# Altium PCB MCU_FOR_DOWNLOAD_V6_8_ROW_PCS.PcbDoc (part 4 of 4)
Units mil, origin at the board's own origin, x right, y up, seen from the top; angles counter-clockwise.
Board outline 2364.06 x 7042.09 mil, 4 copper layers (Top, GND1, GND2, Bottom), stack 35.4 mil thick; 280 components, 38 nets, 1144 pads, 944 vias.
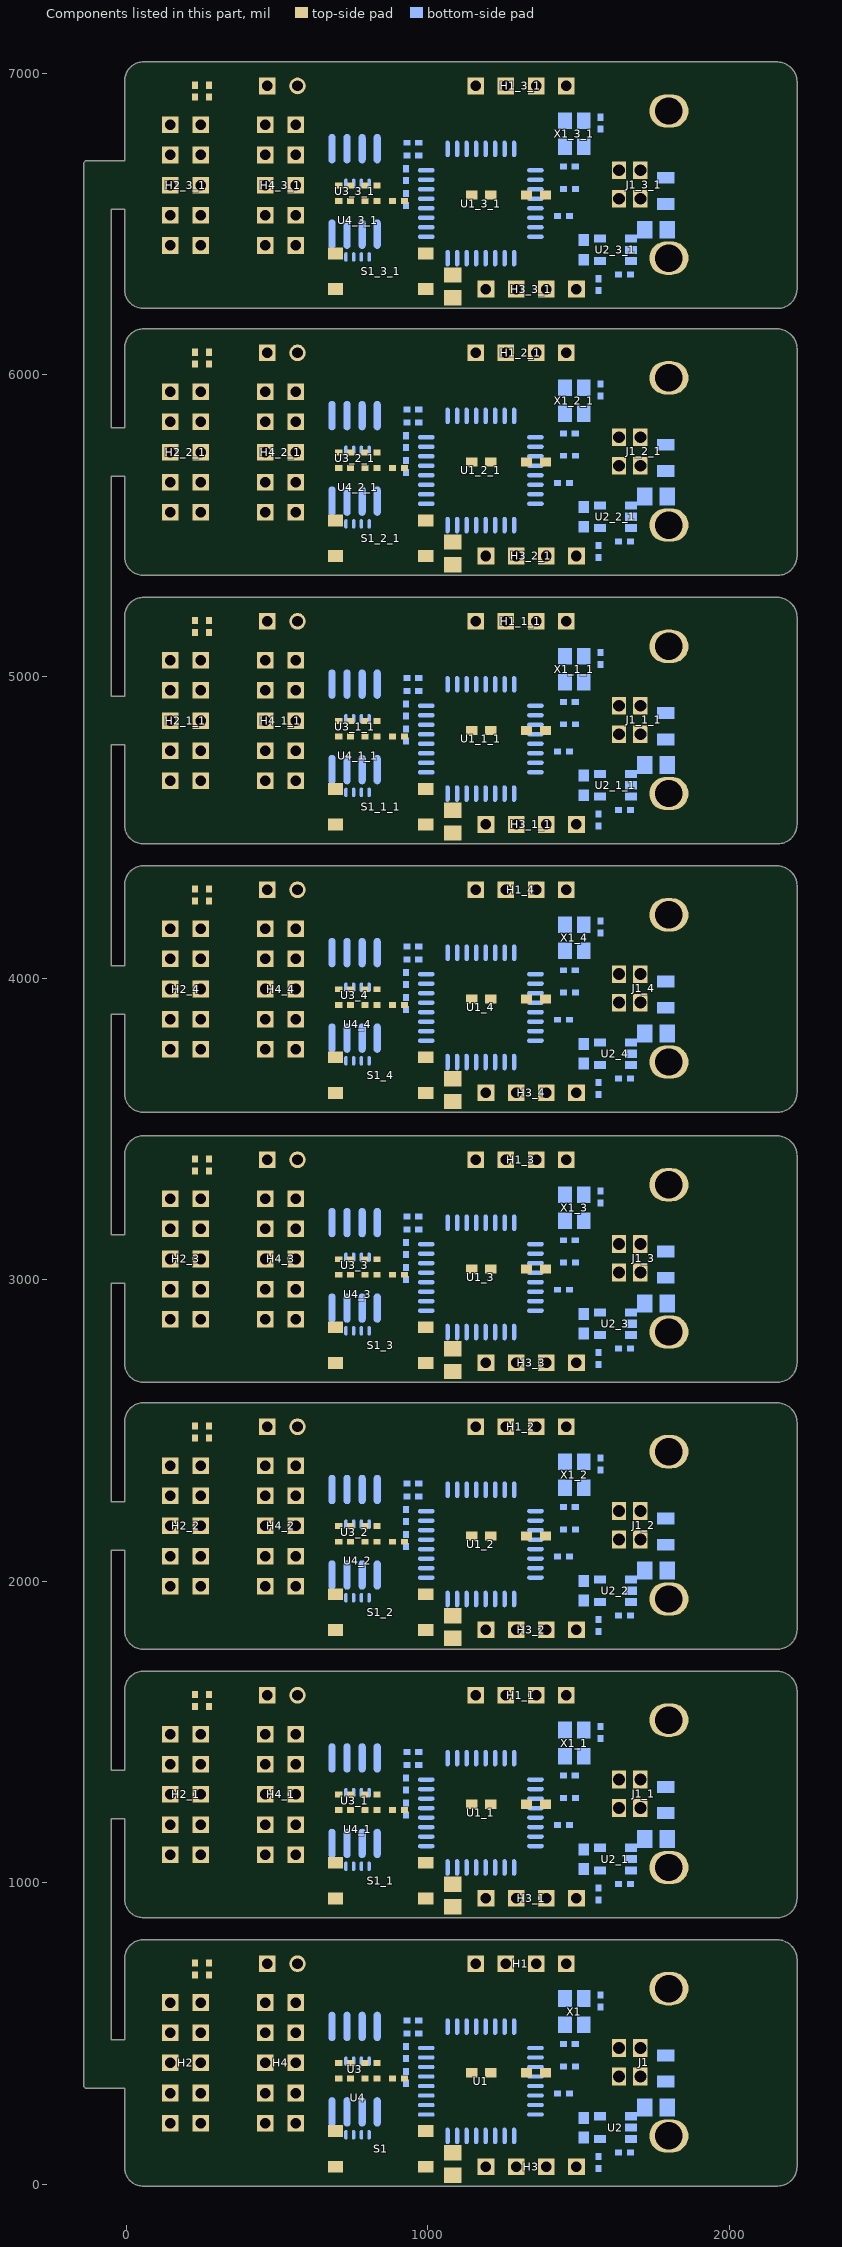
[diagram p4: the components of this part, seen from the top]

## Via types
v1: diameter 16/16/16/16 (per signal layer), hole 8, Top to Bottom, 936 vias
v2: diameter 55/55/55/55 (per signal layer), hole 37, Top to Bottom, 8 vias

## Nets (pads, with @x,y where several pads share a name; then routed paths per layer and width w, separated by ;. In a path a pad name is that pad's centre, name@x,y a point inside that pad or via, vN(x,y) a via of type N, cw(c..) or ccw(c..) an arc to the next point about the centre after c; other vN are vias at no path point) (continued)
copper on no net: (continued)
  other v1: 1723.62,917.17 1066.93,927.4 633.86,933.31 87.4,936.85 293.7,940 222.83,940.79 830.71,941.18 512.2,943.15 891.73,943.15 338.19,945.12 440.16,944.72 605.51,946.3 387.8,947.09 1934.25,949.45 61.81,958.11 772.83,957.72 1718.5,958.11 1917.32,1063.23 1896.46,1112.83 1261.81,1143.94 31.5,1189.21 403.54,1202.99 1909.45,1210.87 1120.08,1226.61 651.97,1235.28 118.11,1242.36 366.54,1249.84 297.24,1285.67 608.27,1291.18 1070.87,1307.32 1141.73,1309.29 1196.85,1327.01 685.04,1332.91 1913.39,1348.66 616.14,1380.16 25.2,1399.45 354.33,1403.78 1009.84,1407.72 1840.55,1415.59 1336.61,1417.56 1393.31,1419.53 1584.65,1425.43 1907.48,1441.18 1631.89,1458.9 1738.19,1464.8 1244.09,1478.58 874.02,1480.55 307.09,1482.52 1362.2,1492.36 1307.09,1496.3 1047.24,1510.08 991.34,1541.18 192.91,1541.57 1661.42,1553.39 572.83,1559.29 490.16,1561.26 1539.37,1578.98 419.29,1586.46 27.56,1587.64 371.26,1591.97 145.67,1611.65 337.4,1615.59 1098.82,1620.31 649.61,1623.07 921.26,1625.04 1635.83,1626.22 1742.13,1626.22 1909.45,1626.22 1828.74,1628.19 527.56,1668.35 761.81,1673.46 982.28,1673.86 1383.86,1673.46 1771.65,1673.46 1236.22,1677.4 1723.62,1807.17 1066.93,1817.4 633.86,1823.31 87.4,1826.85 293.7,1830 222.83,1830.79 830.71,1831.18 512.2,1833.15 891.73,1833.15 338.19,1835.12 440.16,1834.72 605.51,1836.3 387.8,1837.09 1934.25,1839.45 61.81,1848.11 772.83,1847.72 1718.5,1848.11 1917.32,1953.23 1896.46,2002.83 1261.81,2033.94 31.5,2079.21 403.54,2092.99 1909.45,2100.87 1120.08,2116.61 651.97,2125.28 118.11,2132.36 366.54,2139.84 297.24,2175.67 608.27,2181.18 1070.87,2197.32 1141.73,2199.29 1196.85,2217.01 685.04,2222.91 1913.39,2238.66 616.14,2270.16 25.2,2289.45 354.33,2293.78 1009.84,2297.72 1840.55,2305.59 1336.61,2307.56 1393.31,2309.53 1584.65,2315.43 1907.48,2331.18 1631.89,2348.9 1738.19,2354.8 1244.09,2368.58 874.02,2370.55 307.09,2372.52 1362.2,2382.36 1307.09,2386.3 1047.24,2400.08 991.34,2431.18 192.91,2431.57 1661.42,2443.39 572.83,2449.29 490.16,2451.26 1539.37,2468.98 419.29,2476.46 27.56,2477.64 371.26,2481.97 145.67,2501.65 337.4,2505.59 1098.82,2510.31 649.61,2513.07 921.26,2515.04 1635.83,2516.22 1742.13,2516.22 1909.45,2516.22 1828.74,2518.19 527.56,2558.35 761.81,2563.46 982.28,2563.86 1383.86,2563.46 1771.65,2563.46 1236.22,2567.4 1723.62,2692.17 1066.93,2702.4 633.86,2708.31 87.4,2711.85 293.7,2715 222.83,2715.79 830.71,2716.18 512.2,2718.15 891.73,2718.15 338.19,2720.12 440.16,2719.72 605.51,2721.3 387.8,2722.09 1934.25,2724.45 61.81,2733.11 772.83,2732.72 1718.5,2733.11 1917.32,2838.23 1896.46,2887.83 1261.81,2918.94 31.5,2964.21 403.54,2977.99 1909.45,2985.87 1120.08,3001.61 651.97,3010.28 118.11,3017.36 366.54,3024.84 297.24,3060.67 608.27,3066.18 1070.87,3082.32 1141.73,3084.29 1196.85,3102.01 685.04,3107.91 1913.39,3123.66 616.14,3155.16 25.2,3174.45 354.33,3178.78 1009.84,3182.72 1840.55,3190.59 1336.61,3192.56 1393.31,3194.53 1584.65,3200.43 1907.48,3216.18 1631.89,3233.9 1738.19,3239.8 1244.09,3253.58 874.02,3255.55 307.09,3257.52 1362.2,3267.36 1307.09,3271.3 1047.24,3285.08 991.34,3316.18 192.91,3316.57 1661.42,3328.39 572.83,3334.29 490.16,3336.26 1539.37,3353.98 419.29,3361.46 27.56,3362.64 371.26,3366.97 145.67,3386.65 337.4,3390.59 1098.82,3395.31 649.61,3398.07 921.26,3400.04 1635.83,3401.22 1742.13,3401.22 1909.45,3401.22 1828.74,3403.19 527.56,3443.35 761.81,3448.46 982.28,3448.86 1383.86,3448.46 1771.65,3448.46 1236.22,3452.4 1723.62,3587.17 1066.93,3597.4 633.86,3603.31 87.4,3606.85 293.7,3610 222.83,3610.79 830.71,3611.18 512.2,3613.15 891.73,3613.15 338.19,3615.12 440.16,3614.72 605.51,3616.3 387.8,3617.09 1934.25,3619.45 61.81,3628.11 772.83,3627.72 1718.5,3628.11 1917.32,3733.23 1896.46,3782.83 1261.81,3813.94 31.5,3859.21 403.54,3872.99 1909.45,3880.87 1120.08,3896.61 651.97,3905.28 118.11,3912.36 366.54,3919.84 297.24,3955.67 608.27,3961.18 1070.87,3977.32 1141.73,3979.29 1196.85,3997.01 685.04,4002.91 1913.39,4018.66 616.14,4050.16 25.2,4069.45 354.33,4073.78 1009.84,4077.72 1840.55,4085.59 1336.61,4087.56 1393.31,4089.53 1584.65,4095.43 1907.48,4111.18 1631.89,4128.9 1738.19,4134.8 1244.09,4148.58 874.02,4150.55 307.09,4152.52 1362.2,4162.36 1307.09,4166.3 1047.24,4180.08 991.34,4211.18 192.91,4211.57 1661.42,4223.39 572.83,4229.29 490.16,4231.26 1539.37,4248.98 419.29,4256.46 27.56,4257.64 371.26,4261.97 145.67,4281.65 337.4,4285.59 1098.82,4290.31 649.61,4293.07 921.26,4295.04 1635.83,4296.22 1742.13,4296.22 1909.45,4296.22 1828.74,4298.19 527.56,4338.35 761.81,4343.46 982.28,4343.86 1383.86,4343.46 1771.65,4343.46 1236.22,4347.4 1723.62,4477.17 1066.93,4487.4 633.86,4493.31 87.4,4496.85 293.7,4500 222.83,4500.79 830.71,4501.18 512.2,4503.15 891.73,4503.15 338.19,4505.12 440.16,4504.72 605.51,4506.3 387.8,4507.09 1934.25,4509.45 61.81,4518.11 772.83,4517.72 1718.5,4518.11 1917.32,4623.23 1896.46,4672.83 1261.81,4703.94 31.5,4749.21 403.54,4762.99 1909.45,4770.87 1120.08,4786.61 651.97,4795.28 118.11,4802.36 366.54,4809.84 297.24,4845.67 608.27,4851.18 1070.87,4867.32 1141.73,4869.29 1196.85,4887.01 685.04,4892.91 1913.39,4908.66 616.14,4940.16 25.2,4959.45 354.33,4963.78 1009.84,4967.72 1840.55,4975.59 1336.61,4977.56 1393.31,4979.53 1584.65,4985.43 1907.48,5001.18 1631.89,5018.9 1738.19,5024.8 1244.09,5038.58 874.02,5040.55 307.09,5042.52 1362.2,5052.36 1307.09,5056.3 1047.24,5070.08 991.34,5101.18 192.91,5101.57 1661.42,5113.39 572.83,5119.29 490.16,5121.26 1539.37,5138.98 419.29,5146.46 27.56,5147.64 371.26,5151.97 145.67,5171.65 337.4,5175.59 1098.82,5180.31 649.61,5183.07 921.26,5185.04 1635.83,5186.22 1742.13,5186.22 1909.45,5186.22 1828.74,5188.19 527.56,5228.35 761.81,5233.46 982.28,5233.86 1383.86,5233.46 1771.65,5233.46 1236.22,5237.4 1723.62,5367.17 1066.93,5377.4 633.86,5383.31 87.4,5386.85 293.7,5390 222.83,5390.79 830.71,5391.18 512.2,5393.15 891.73,5393.15 338.19,5395.12 440.16,5394.72 605.51,5396.3 387.8,5397.09 1934.25,5399.45 61.81,5408.11 772.83,5407.72 1718.5,5408.11 1917.32,5513.23 1896.46,5562.83 1261.81,5593.94 31.5,5639.21 403.54,5652.99 1909.45,5660.87 1120.08,5676.61 651.97,5685.28 118.11,5692.36 366.54,5699.84 297.24,5735.67 608.27,5741.18 1070.87,5757.32 1141.73,5759.29 1196.85,5777.01 685.04,5782.91 1913.39,5798.66 616.14,5830.16 25.2,5849.45 354.33,5853.78 1009.84,5857.72 1840.55,5865.59 1336.61,5867.56 1393.31,5869.53 1584.65,5875.43 1907.48,5891.18 1631.89,5908.9 1738.19,5914.8 1244.09,5928.58 874.02,5930.55 307.09,5932.52 1362.2,5942.36 1307.09,5946.3 1047.24,5960.08 991.34,5991.18 192.91,5991.57 1661.42,6003.39 572.83,6009.29 490.16,6011.26 1539.37,6028.98 419.29,6036.46 27.56,6037.64 371.26,6041.97 145.67,6061.65 337.4,6065.59 1098.82,6070.31 649.61,6073.07 921.26,6075.04 1635.83,6076.22 1742.13,6076.22 1909.45,6076.22 1828.74,6078.19 527.56,6118.35 761.81,6123.46 982.28,6123.86 1383.86,6123.46 1771.65,6123.46 1236.22,6127.4 1723.62,6252.17 1066.93,6262.4 633.86,6268.31 87.4,6271.85 293.7,6275 222.83,6275.79 830.71,6276.18 512.2,6278.15 891.73,6278.15 338.19,6280.12 440.16,6279.72 605.51,6281.3 387.8,6282.09 1934.25,6284.45 61.81,6293.11 772.83,6292.72 1718.5,6293.11 1917.32,6398.23 1896.46,6447.83 1261.81,6478.94 31.5,6524.21 403.54,6537.99 1909.45,6545.87 1120.08,6561.61 651.97,6570.28 118.11,6577.36 366.54,6584.84 297.24,6620.67 608.27,6626.18 1070.87,6642.32 1141.73,6644.29 1196.85,6662.01 685.04,6667.91 1913.39,6683.66 616.14,6715.16 25.2,6734.45 354.33,6738.78 1009.84,6742.72 1840.55,6750.59 1336.61,6752.56 1393.31,6754.53 1584.65,6760.43 1907.48,6776.18 1631.89,6793.9 1738.19,6799.8 1244.09,6813.58 874.02,6815.55 307.09,6817.52 1362.2,6827.36 1307.09,6831.3 1047.24,6845.08 991.34,6876.18 192.91,6876.57 1661.42,6888.39 572.83,6894.29 490.16,6896.26 1539.37,6913.98 419.29,6921.46 27.56,6922.64 371.26,6926.97 145.67,6946.65 337.4,6950.59 1098.82,6955.31 649.61,6958.07 921.26,6960.04 1635.83,6961.22 1742.13,6961.22 1909.45,6961.22 1828.74,6963.19 527.56,7003.35 761.81,7008.46 982.28,7008.86 1383.86,7008.46 1771.65,7008.46 1236.22,7012.4

## Polygon pours and split planes (outlines as drawn)
GGND on Top "Top-GGND" (solid, remove dead copper, pour order 24): -3.15,0 2215,0 2215,818.5 -3.15,818.5
no net on Top "Top-GGND" (solid, remove dead copper, pour order 22): -3.15,890 2215,890 2215,1708.5 -3.15,1708.5
no net on Top "Top-GGND" (solid, remove dead copper, pour order 20): -3.15,1780 2215,1780 2215,2598.5 -3.15,2598.5
no net on Top "Top-GGND" (solid, remove dead copper, pour order 18): -3.15,2665 2215,2665 2215,3483.5 -3.15,3483.5
no net on Top "Top-GGND" (solid, remove dead copper, pour order 17): -3.15,6225 2215,6225 2215,7043.5 -3.15,7043.5
no net on Top "Top-GGND" (solid, remove dead copper, pour order 19): -3.15,5340 2215,5340 2215,6158.5 -3.15,6158.5
no net on Top "Top-GGND" (solid, remove dead copper, pour order 21): -3.15,4450 2215,4450 2215,5268.5 -3.15,5268.5
no net on Top "Top-GGND" (solid, remove dead copper, pour order 23): -3.15,3560 2215,3560 2215,4378.5 -3.15,4378.5
GGND on Bottom "Bottom-GGND" (solid, remove dead copper, pour order 32): -6.69,0 2210,0 2210,810.24 -6.69,810.24
no net on Bottom "Bottom-GGND" (solid, remove dead copper, pour order 30): -6.69,890 2210,890 2210,1700.24 -6.69,1700.24
no net on Bottom "Bottom-GGND" (solid, remove dead copper, pour order 28): -6.69,1780 2210,1780 2210,2590.24 -6.69,2590.24
no net on Bottom "Bottom-GGND" (solid, remove dead copper, pour order 26): -6.69,2665 2210,2665 2210,3475.24 -6.69,3475.24
no net on Bottom "Bottom-GGND" (solid, remove dead copper, pour order 25): -6.69,6225 2210,6225 2210,7035.24 -6.69,7035.24
no net on Bottom "Bottom-GGND" (solid, remove dead copper, pour order 27): -6.69,5340 2210,5340 2210,6150.24 -6.69,6150.24
no net on Bottom "Bottom-GGND" (solid, remove dead copper, pour order 29): -6.69,4450 2210,4450 2210,5260.24 -6.69,5260.24
no net on Bottom "Bottom-GGND" (solid, remove dead copper, pour order 31): -6.69,3560 2210,3560 2210,4370.24 -6.69,4370.24

## Keep-outs
Keep-Out Layer:
  lines w10: 0,59.01 ccw(c56.63,56.63) 59.1,0 ; 0,59.01 0,325 -55,325 -135,325 -135,3143.54 -135,6703.54 -55,6703.54 0,6703.54 0,6973.03 cw(c57.94,6974.14) 59.06,7032.09 2160,7032.09 cw(c2157.3,6970.34) 2219.06,6973.03 2219.06,6284.06 cw(c2159.85,6284.26) 2159.95,6225.05 ; 0,748.03 cw(c57.94,749.14) 59.06,807.09 2160,807.09 cw(c2157.3,745.34) 2219.06,748.03 2219.06,59.06 cw(c2159.85,59.26) 2159.95,0.05 ; 0,750 0,430 -55,430 -55,1245 0,1245 0,949.01 ; 0,949.01 ccw(c56.63,946.63) 59.1,890 ; 0,1839.01 ccw(c56.63,1836.63) 59.1,1780 ; 0,1839.01 0,2145 -55,2145 -55,1330 0,1330 0,1638.03 cw(c57.94,1639.14) 59.06,1697.09 2160,1697.09 cw(c2157.3,1635.34) 2219.06,1638.03 2219.06,949.06 cw(c2159.85,949.26) 2159.95,890.05 ; 0,2724.01 ccw(c56.63,2721.63) 59.1,2665 ; 0,2724.01 0,3030 -55,3030 -55,2225 0,2225 0,2528.03 cw(c57.94,2529.14) 59.06,2587.09 2160,2587.09 cw(c2157.3,2525.34) 2219.06,2528.03 2219.06,1839.06 cw(c2159.85,1839.26) 2159.95,1780.05 ; 0,3619.01 ccw(c56.63,3616.63) 59.1,3560 ; 0,3619.01 0,3920 -55,3920 -55,3110 0,3110 0,3413.03 cw(c57.94,3414.14) 59.06,3472.09 2160,3472.09 cw(c2157.3,3410.34) 2219.06,3413.03 2219.06,2724.06 cw(c2159.85,2724.26) 2159.95,2665.05 ; 0,4308.03 cw(c57.94,4309.14) 59.06,4367.09 2160,4367.09 cw(c2157.3,4305.34) 2219.06,4308.03 2219.06,3619.06 cw(c2159.85,3619.26) 2159.95,3560.05 ; 0,4310 0,4000 -55,4000 -55,4820 0,4820 0,4509.01 ; 0,4509.01 ccw(c56.63,4506.63) 59.1,4450 ; 0,5399.01 ccw(c56.63,5396.63) 59.1,5340 ; 0,5399.01 0,5695 -55,5695 -55,4890 0,4890 0,5198.03 cw(c57.94,5199.14) 59.06,5257.09 2160,5257.09 cw(c2157.3,5195.34) 2219.06,5198.03 2219.06,4509.06 cw(c2159.85,4509.26) 2159.95,4450.05 ; 0,6284.01 ccw(c56.63,6281.63) 59.1,6225 ; 0,6284.01 0,6610 -55,6610 -55,5785 0,5785 0,6088.03 cw(c57.94,6089.14) 59.06,6147.09 2160,6147.09 cw(c2157.3,6085.34) 2219.06,6088.03 2219.06,5399.06 cw(c2159.85,5399.26) 2159.95,5340.05 ; 59.06,0 2160,0 ; 59.06,890 2160,890 ; 59.06,1780 2160,1780 ; 59.06,2665 2160,2665 ; 59.06,3560 2160,3560 ; 59.06,4450 2160,4450 ; 59.06,5340 2160,5340 ; 59.06,6225 2160,6225

## Silkscreen, mask and mechanical layers (free items; w line width, h text height)
Silkscreen Top:
  drawing of 232 lines, arcs and shapes, not listed
  text "VDD" at 627.95,6971.06 h25.59
  text "VCC" at 330.31,6969.09 h25.59
  text "深圳市集贤科技有限公司" at 1613.78,6967.52 h50
  text "1.0" at 1229.53,6841.54 h29.53
  text "0.7" at 1326.38,6841.93 h29.53
  text "1.1" at 1132.28,6840.75 h29.53
  text "0.6" at 1427.95,6840.75 h29.53
  text "WP" at 348.43,6804.92 h25.59 r90
  text "CS" at 405.91,6801.38 h25.59 r90
  text "CS" at 89.37,6799.02 h25.59 r90
  text "WP" at 657.09,6792.72 h25.59 r90
  text "HW SPI Jumpers" at 681.89,6773.82 h29.53
  text "Int:R7=R8=0R" at 704.33,6705.71 h29.53
  text "VPP" at 87.8,6699.8 h25.59 r90
  text "VPP" at 412.2,6697.05 h25.59 r90
  text "VCC" at 347.24,6693.11 h25.59 r90
  text "VCC" at 655.91,6680.91 h25.59 r90
  text "GND" at 89.37,6592.72 h25.59 r90
  text "GND" at 343.31,6591.54 h25.59 r90
  text "GND" at 405.51,6588.78 h25.59 r90
  text "GND" at 651.97,6579.33 h25.59 r90
  text "P2.4" at 88.58,6489.57 h25.59 r90
  text "P2.3" at 343.31,6487.2 h25.59 r90
  text "Ext:R9=R10=R13=0R" at 665.35,6478.15 h25.59
  text "POWER" at 1270.47,6440.75 h39.37
  text "MISO" at 649.21,6383.66 h25.59 r90
  text "MOSI" at 90.55,6379.33 h25.59 r90
  text "MISO" at 342.52,6377.36 h25.59 r90
  text "MOSI" at 406.69,6375.39 h25.59 r90
  text "VDD" at 1130.71,6345.47 h29.53
  text "C2D" at 1230.71,6346.26 h29.53
  text "CK" at 1374.41,6343.5 h29.53
  text "GND" at 1445.67,6344.29 h29.53
  text "SW" at 188.19,6265.16 h49.21 r90
  text "HW" at 505.51,6260.43 h49.21 r90
  text "SPI" at 269.29,6258.46 h49.21 r90
  text "MCU_FOR_DOWMLOAD_v1.0" at 1627.17,6254.92 h29.53
  text "SPI" at 590.16,6253.74 h49.21 r90
  text "VDD" at 627.95,6086.06 h25.59
  text "VCC" at 330.31,6084.09 h25.59
  text "深圳市集贤科技有限公司" at 1613.78,6082.52 h50
  text "1.0" at 1229.53,5956.54 h29.53
  text "0.7" at 1326.38,5956.93 h29.53
  text "1.1" at 1132.28,5955.75 h29.53
  text "0.6" at 1427.95,5955.75 h29.53
  text "WP" at 348.43,5919.92 h25.59 r90
  text "CS" at 405.91,5916.38 h25.59 r90
  text "CS" at 89.37,5914.02 h25.59 r90
  text "WP" at 657.09,5907.72 h25.59 r90
  text "HW SPI Jumpers" at 681.89,5888.82 h29.53
  text "Int:R7=R8=0R" at 704.33,5820.71 h29.53
  text "VPP" at 87.8,5814.8 h25.59 r90
  text "VPP" at 412.2,5812.05 h25.59 r90
  text "VCC" at 347.24,5808.11 h25.59 r90
  text "VCC" at 655.91,5795.91 h25.59 r90
  text "GND" at 89.37,5707.72 h25.59 r90
  text "GND" at 343.31,5706.54 h25.59 r90
  text "GND" at 405.51,5703.78 h25.59 r90
  text "GND" at 651.97,5694.33 h25.59 r90
  text "P2.4" at 88.58,5604.57 h25.59 r90
  text "P2.3" at 343.31,5602.2 h25.59 r90
  text "Ext:R9=R10=R13=0R" at 665.35,5593.15 h25.59
  text "POWER" at 1270.47,5555.75 h39.37
  text "MISO" at 649.21,5498.66 h25.59 r90
  text "MOSI" at 90.55,5494.33 h25.59 r90
  text "MISO" at 342.52,5492.36 h25.59 r90
  text "MOSI" at 406.69,5490.39 h25.59 r90
  text "VDD" at 1130.71,5460.47 h29.53
  text "C2D" at 1230.71,5461.26 h29.53
  text "CK" at 1374.41,5458.5 h29.53
  text "GND" at 1445.67,5459.29 h29.53
  text "SW" at 188.19,5380.16 h49.21 r90
  text "HW" at 505.51,5375.43 h49.21 r90
  text "SPI" at 269.29,5373.46 h49.21 r90
  text "MCU_FOR_DOWMLOAD_v1.0" at 1627.17,5369.92 h29.53
  text "SPI" at 590.16,5368.74 h49.21 r90
  text "VDD" at 627.95,5196.06 h25.59
  text "VCC" at 330.31,5194.09 h25.59
  text "深圳市集贤科技有限公司" at 1613.78,5192.52 h50
  text "1.0" at 1229.53,5066.54 h29.53
  text "0.7" at 1326.38,5066.93 h29.53
  text "1.1" at 1132.28,5065.75 h29.53
  text "0.6" at 1427.95,5065.75 h29.53
  text "WP" at 348.43,5029.92 h25.59 r90
  text "CS" at 405.91,5026.38 h25.59 r90
  text "CS" at 89.37,5024.02 h25.59 r90
  text "WP" at 657.09,5017.72 h25.59 r90
  text "HW SPI Jumpers" at 681.89,4998.82 h29.53
  text "Int:R7=R8=0R" at 704.33,4930.71 h29.53
  text "VPP" at 87.8,4924.8 h25.59 r90
  text "VPP" at 412.2,4922.05 h25.59 r90
  text "VCC" at 347.24,4918.11 h25.59 r90
  text "VCC" at 655.91,4905.91 h25.59 r90
  text "GND" at 89.37,4817.72 h25.59 r90
  text "GND" at 343.31,4816.54 h25.59 r90
  text "GND" at 405.51,4813.78 h25.59 r90
  text "GND" at 651.97,4804.33 h25.59 r90
  text "P2.4" at 88.58,4714.57 h25.59 r90
  text "P2.3" at 343.31,4712.2 h25.59 r90
  text "Ext:R9=R10=R13=0R" at 665.35,4703.15 h25.59
  text "POWER" at 1270.47,4665.75 h39.37
  text "MISO" at 649.21,4608.66 h25.59 r90
  text "MOSI" at 90.55,4604.33 h25.59 r90
  text "MISO" at 342.52,4602.36 h25.59 r90
  text "MOSI" at 406.69,4600.39 h25.59 r90
  text "VDD" at 1130.71,4570.47 h29.53
  text "C2D" at 1230.71,4571.26 h29.53
  text "CK" at 1374.41,4568.5 h29.53
  text "GND" at 1445.67,4569.29 h29.53
  text "SW" at 188.19,4490.16 h49.21 r90
  text "HW" at 505.51,4485.43 h49.21 r90
  text "SPI" at 269.29,4483.46 h49.21 r90
  text "MCU_FOR_DOWMLOAD_v1.0" at 1627.17,4479.92 h29.53
  text "SPI" at 590.16,4478.74 h49.21 r90
  text "VDD" at 627.95,4306.06 h25.59
  text "VCC" at 330.31,4304.09 h25.59
  text "深圳市集贤科技有限公司" at 1613.78,4302.52 h50
  text "1.0" at 1229.53,4176.54 h29.53
  text "0.7" at 1326.38,4176.93 h29.53
  text "1.1" at 1132.28,4175.75 h29.53
  text "0.6" at 1427.95,4175.75 h29.53
  text "WP" at 348.43,4139.92 h25.59 r90
  text "CS" at 405.91,4136.38 h25.59 r90
  text "CS" at 89.37,4134.02 h25.59 r90
  text "WP" at 657.09,4127.72 h25.59 r90
  text "HW SPI Jumpers" at 681.89,4108.82 h29.53
  text "Int:R7=R8=0R" at 704.33,4040.71 h29.53
  text "VPP" at 87.8,4034.8 h25.59 r90
  text "VPP" at 412.2,4032.05 h25.59 r90
  text "VCC" at 347.24,4028.11 h25.59 r90
  text "VCC" at 655.91,4015.91 h25.59 r90
  text "GND" at 89.37,3927.72 h25.59 r90
  text "GND" at 343.31,3926.54 h25.59 r90
  text "GND" at 405.51,3923.78 h25.59 r90
  text "GND" at 651.97,3914.33 h25.59 r90
  text "P2.4" at 88.58,3824.57 h25.59 r90
  text "P2.3" at 343.31,3822.2 h25.59 r90
  text "Ext:R9=R10=R13=0R" at 665.35,3813.15 h25.59
  text "POWER" at 1270.47,3775.75 h39.37
  text "MISO" at 649.21,3718.66 h25.59 r90
  text "MOSI" at 90.55,3714.33 h25.59 r90
  text "MISO" at 342.52,3712.36 h25.59 r90
  text "MOSI" at 406.69,3710.39 h25.59 r90
  text "VDD" at 1130.71,3680.47 h29.53
  text "C2D" at 1230.71,3681.26 h29.53
  text "CK" at 1374.41,3678.5 h29.53
  text "GND" at 1445.67,3679.29 h29.53
  text "SW" at 188.19,3600.16 h49.21 r90
  text "HW" at 505.51,3595.43 h49.21 r90
  text "SPI" at 269.29,3593.46 h49.21 r90
  text "MCU_FOR_DOWMLOAD_v1.0" at 1627.17,3589.92 h29.53
  text "SPI" at 590.16,3588.74 h49.21 r90
  text "VDD" at 627.95,3411.06 h25.59
  text "VCC" at 330.31,3409.09 h25.59
  text "深圳市集贤科技有限公司" at 1613.78,3407.52 h50
  text "1.0" at 1229.53,3281.54 h29.53
  text "0.7" at 1326.38,3281.93 h29.53
  text "1.1" at 1132.28,3280.75 h29.53
  text "0.6" at 1427.95,3280.75 h29.53
  text "WP" at 348.43,3244.92 h25.59 r90
  text "CS" at 405.91,3241.38 h25.59 r90
  text "CS" at 89.37,3239.02 h25.59 r90
  text "WP" at 657.09,3232.72 h25.59 r90
  text "HW SPI Jumpers" at 681.89,3213.82 h29.53
  text "Int:R7=R8=0R" at 704.33,3145.71 h29.53
  text "VPP" at 87.8,3139.8 h25.59 r90
  text "VPP" at 412.2,3137.05 h25.59 r90
  text "VCC" at 347.24,3133.11 h25.59 r90
  text "VCC" at 655.91,3120.91 h25.59 r90
  text "GND" at 89.37,3032.72 h25.59 r90
  text "GND" at 343.31,3031.54 h25.59 r90
  text "GND" at 405.51,3028.78 h25.59 r90
  text "GND" at 651.97,3019.33 h25.59 r90
  text "P2.4" at 88.58,2929.57 h25.59 r90
  text "P2.3" at 343.31,2927.2 h25.59 r90
  text "Ext:R9=R10=R13=0R" at 665.35,2918.15 h25.59
  text "POWER" at 1270.47,2880.75 h39.37
  text "MISO" at 649.21,2823.66 h25.59 r90
  text "MOSI" at 90.55,2819.33 h25.59 r90
  text "MISO" at 342.52,2817.36 h25.59 r90
  text "MOSI" at 406.69,2815.39 h25.59 r90
  text "VDD" at 1130.71,2785.47 h29.53
  text "C2D" at 1230.71,2786.26 h29.53
  text "CK" at 1374.41,2783.5 h29.53
  text "GND" at 1445.67,2784.29 h29.53
  text "SW" at 188.19,2705.16 h49.21 r90
  text "HW" at 505.51,2700.43 h49.21 r90
  text "SPI" at 269.29,2698.46 h49.21 r90
  text "MCU_FOR_DOWMLOAD_v1.0" at 1627.17,2694.92 h29.53
  text "SPI" at 590.16,2693.74 h49.21 r90
  text "VDD" at 627.95,2526.06 h25.59
  text "VCC" at 330.31,2524.09 h25.59
  text "深圳市集贤科技有限公司" at 1613.78,2522.52 h50
  text "1.0" at 1229.53,2396.54 h29.53
  text "0.7" at 1326.38,2396.93 h29.53
  text "1.1" at 1132.28,2395.75 h29.53
  text "0.6" at 1427.95,2395.75 h29.53
  text "WP" at 348.43,2359.92 h25.59 r90
  text "CS" at 405.91,2356.38 h25.59 r90
  text "CS" at 89.37,2354.02 h25.59 r90
  text "WP" at 657.09,2347.72 h25.59 r90
  text "HW SPI Jumpers" at 681.89,2328.82 h29.53
  text "Int:R7=R8=0R" at 704.33,2260.71 h29.53
  text "VPP" at 87.8,2254.8 h25.59 r90
  text "VPP" at 412.2,2252.05 h25.59 r90
  text "VCC" at 347.24,2248.11 h25.59 r90
  text "VCC" at 655.91,2235.91 h25.59 r90
  text "GND" at 89.37,2147.72 h25.59 r90
  text "GND" at 343.31,2146.54 h25.59 r90
  text "GND" at 405.51,2143.78 h25.59 r90
  text "GND" at 651.97,2134.33 h25.59 r90
  text "P2.4" at 88.58,2044.57 h25.59 r90
  text "P2.3" at 343.31,2042.2 h25.59 r90
  text "Ext:R9=R10=R13=0R" at 665.35,2033.15 h25.59
  text "POWER" at 1270.47,1995.75 h39.37
  text "MISO" at 649.21,1938.66 h25.59 r90
  text "MOSI" at 90.55,1934.33 h25.59 r90
  text "MISO" at 342.52,1932.36 h25.59 r90
  text "MOSI" at 406.69,1930.39 h25.59 r90
  text "VDD" at 1130.71,1900.47 h29.53
  text "C2D" at 1230.71,1901.26 h29.53
  text "CK" at 1374.41,1898.5 h29.53
  text "GND" at 1445.67,1899.29 h29.53
  text "SW" at 188.19,1820.16 h49.21 r90
  text "HW" at 505.51,1815.43 h49.21 r90
  text "SPI" at 269.29,1813.46 h49.21 r90
  text "MCU_FOR_DOWMLOAD_v1.0" at 1627.17,1809.92 h29.53
  text "SPI" at 590.16,1808.74 h49.21 r90
  text "VDD" at 627.95,1636.06 h25.59
  text "VCC" at 330.31,1634.09 h25.59
  text "深圳市集贤科技有限公司" at 1613.78,1632.52 h50
  text "1.0" at 1229.53,1506.54 h29.53
  text "0.7" at 1326.38,1506.93 h29.53
  text "1.1" at 1132.28,1505.75 h29.53
  text "0.6" at 1427.95,1505.75 h29.53
  text "WP" at 348.43,1469.92 h25.59 r90
  text "CS" at 405.91,1466.38 h25.59 r90
  text "CS" at 89.37,1464.02 h25.59 r90
  text "WP" at 657.09,1457.72 h25.59 r90
  text "HW SPI Jumpers" at 681.89,1438.82 h29.53
  text "Int:R7=R8=0R" at 704.33,1370.71 h29.53
  text "VPP" at 87.8,1364.8 h25.59 r90
  text "VPP" at 412.2,1362.05 h25.59 r90
  text "VCC" at 347.24,1358.11 h25.59 r90
  text "VCC" at 655.91,1345.91 h25.59 r90
  text "GND" at 89.37,1257.72 h25.59 r90
  text "GND" at 343.31,1256.54 h25.59 r90
  text "GND" at 405.51,1253.78 h25.59 r90
  text "GND" at 651.97,1244.33 h25.59 r90
  text "P2.4" at 88.58,1154.57 h25.59 r90
  text "P2.3" at 343.31,1152.2 h25.59 r90
  text "Ext:R9=R10=R13=0R" at 665.35,1143.15 h25.59
  text "POWER" at 1270.47,1105.75 h39.37
  text "MISO" at 649.21,1048.66 h25.59 r90
  text "MOSI" at 90.55,1044.33 h25.59 r90
  text "MISO" at 342.52,1042.36 h25.59 r90
  text "MOSI" at 406.69,1040.39 h25.59 r90
  text "VDD" at 1130.71,1010.47 h29.53
  text "C2D" at 1230.71,1011.26 h29.53
  text "CK" at 1374.41,1008.5 h29.53
  text "GND" at 1445.67,1009.29 h29.53
  text "SW" at 188.19,930.16 h49.21 r90
  text "HW" at 505.51,925.43 h49.21 r90
  text "SPI" at 269.29,923.46 h49.21 r90
  text "MCU_FOR_DOWMLOAD_v1.0" at 1627.17,919.92 h29.53
  text "SPI" at 590.16,918.74 h49.21 r90
  text "VDD" at 627.95,746.06 h25.59
  text "VCC" at 330.31,744.09 h25.59
  text "深圳市集贤科技有限公司" at 1613.78,742.52 h50
  text "1.0" at 1229.53,616.54 h29.53
  text "0.7" at 1326.38,616.93 h29.53
  text "1.1" at 1132.28,615.75 h29.53
  text "0.6" at 1427.95,615.75 h29.53
  text "WP" at 348.43,579.92 h25.59 r90
  text "CS" at 405.91,576.38 h25.59 r90
  text "CS" at 89.37,574.02 h25.59 r90
  text "WP" at 657.09,567.72 h25.59 r90
  text "HW SPI Jumpers" at 681.89,548.82 h29.53
  text "Int:R7=R8=0R" at 704.33,480.71 h29.53
  text "VPP" at 87.8,474.8 h25.59 r90
  text "VPP" at 412.2,472.05 h25.59 r90
  text "VCC" at 347.24,468.11 h25.59 r90
  text "VCC" at 655.91,455.91 h25.59 r90
  text "GND" at 89.37,367.72 h25.59 r90
  text "GND" at 343.31,366.54 h25.59 r90
  text "GND" at 405.51,363.78 h25.59 r90
  text "GND" at 651.97,354.33 h25.59 r90
  text "P2.4" at 88.58,264.57 h25.59 r90
  text "P2.3" at 343.31,262.2 h25.59 r90
  text "Ext:R9=R10=R13=0R" at 665.35,253.15 h25.59
  text "POWER" at 1270.47,215.75 h39.37
  text "MISO" at 649.21,158.66 h25.59 r90
  text "MOSI" at 90.55,154.33 h25.59 r90
  text "MISO" at 342.52,152.36 h25.59 r90
  text "MOSI" at 406.69,150.39 h25.59 r90
  text "VDD" at 1130.71,120.47 h29.53
  text "C2D" at 1230.71,121.26 h29.53
  text "CK" at 1374.41,118.5 h29.53
  text "GND" at 1445.67,119.29 h29.53
  text "SW" at 188.19,40.16 h49.21 r90
  text "HW" at 505.51,35.43 h49.21 r90
  text "SPI" at 269.29,33.46 h49.21 r90
  text "MCU_FOR_DOWMLOAD_v1.0" at 1627.17,29.92 h29.53
  text "SPI" at 590.16,28.74 h49.21 r90
Silkscreen Bottom:
  lines w11.81: 103.4,156.3 103.4,654.72 290.7,654.72 290.7,156.3 103.4,156.3 ; 103.4,1046.3 290.7,1046.3 290.7,1544.72 103.4,1544.72 103.4,1046.3 ; 103.4,1936.3 290.7,1936.3 290.7,2434.72 103.4,2434.72 103.4,1936.3 ; 103.4,2821.3 290.7,2821.3 290.7,3319.72 103.4,3319.72 103.4,2821.3 ; 103.4,3716.3 290.7,3716.3 290.7,4214.72 103.4,4214.72 103.4,3716.3 ; 103.4,4606.3 103.4,5104.72 290.7,5104.72 290.7,4606.3 103.4,4606.3 ; 103.4,5496.3 103.4,5994.72 290.7,5994.72 290.7,5496.3 103.4,5496.3 ; 103.4,6381.3 103.4,6879.72 290.7,6879.72 290.7,6381.3 103.4,6381.3 ; 416.78,152.76 416.78,651.18 604.08,651.18 604.08,152.76 416.78,152.76 ; 416.78,1042.76 604.08,1042.76 604.08,1541.18 416.78,1541.18 416.78,1042.76 ; 416.78,1932.76 604.08,1932.76 604.08,2431.18 416.78,2431.18 416.78,1932.76 ; 416.78,2817.76 604.08,2817.76 604.08,3316.18 416.78,3316.18 416.78,2817.76 ; 416.78,3712.76 604.08,3712.76 604.08,4211.18 416.78,4211.18 416.78,3712.76 ; 416.78,4602.76 416.78,5101.18 604.08,5101.18 604.08,4602.76 416.78,4602.76 ; 416.78,5492.76 416.78,5991.18 604.08,5991.18 604.08,5492.76 416.78,5492.76 ; 416.78,6377.76 416.78,6876.18 604.08,6876.18 604.08,6377.76 416.78,6377.76
Drill Drawing:
  lines w1: 42.78,-3.1 42.8,-3.1 ; 42.78,886.9 42.8,886.9 ; 42.78,1776.9 42.8,1776.9 ; 42.78,2661.9 42.8,2661.9 ; 42.78,3556.9 42.8,3556.9 ; 42.78,4446.9 42.8,4446.9 ; 42.78,5336.9 42.8,5336.9 ; 42.78,6221.9 42.8,6221.9